# Altium PCB QTR-8A Array Sensor.PcbDoc
Units mil, origin at the board's own origin, x right, y up, seen from the top; angles counter-clockwise.
Board outline 2370 x 975 mil, 2 copper layers (Top Layer, Bottom Layer); 31 components, 15 nets, 90 pads, 17 vias.
Unrouted connection lines stored in the file: 3.
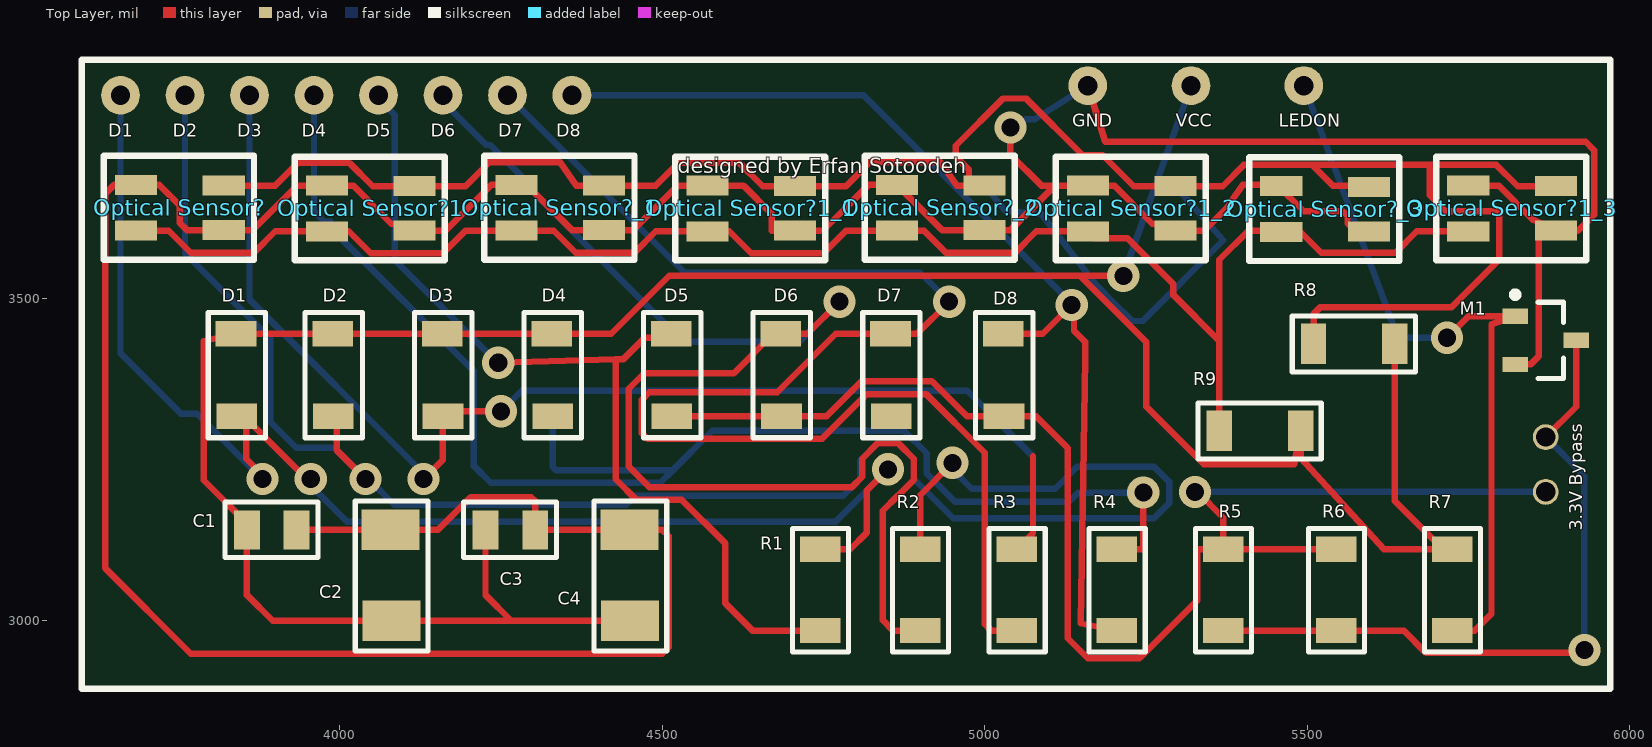
[diagram p0: Top Layer view]
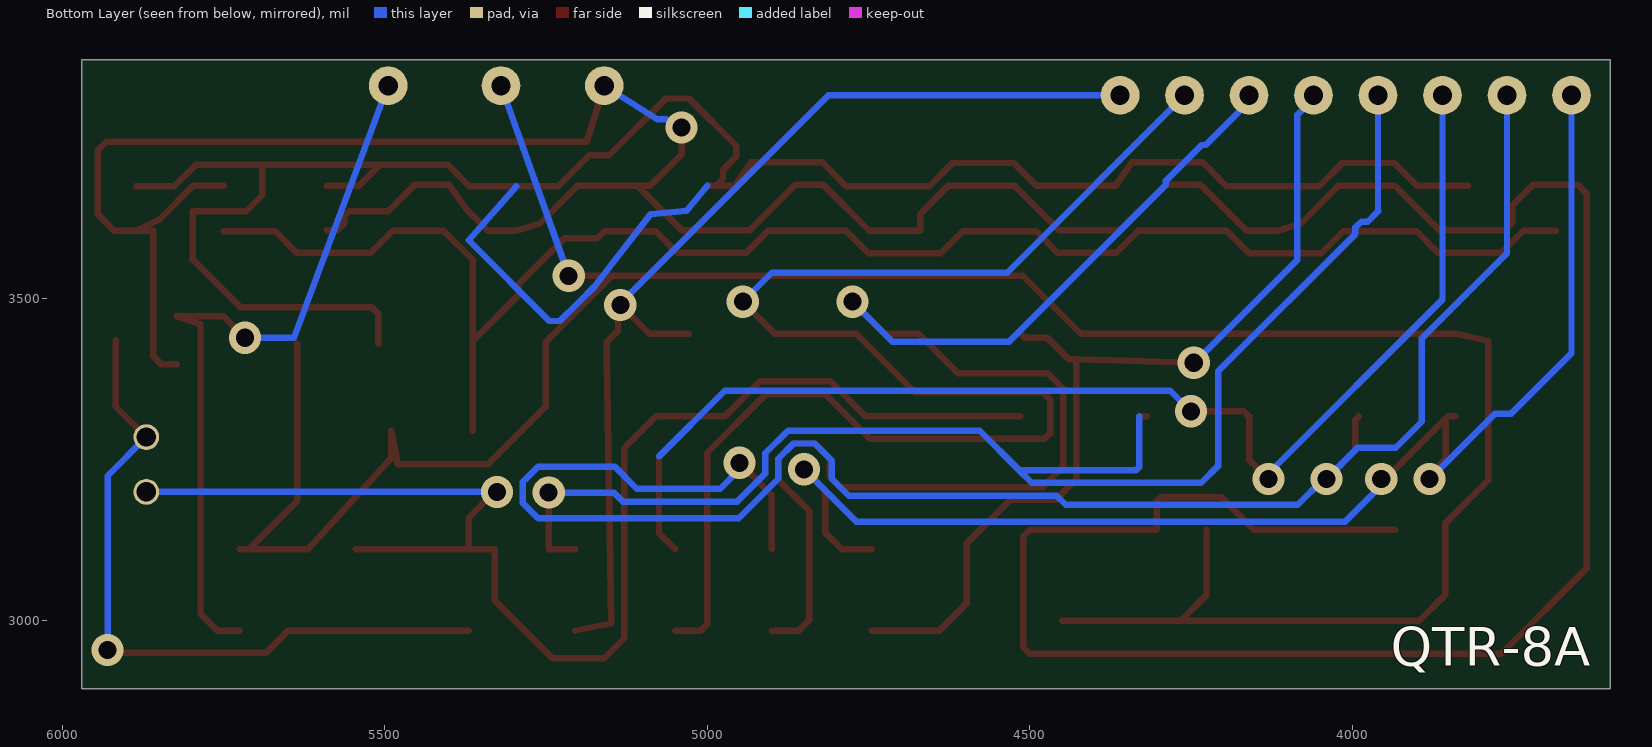
[diagram p1: Bottom Layer view, seen from below]
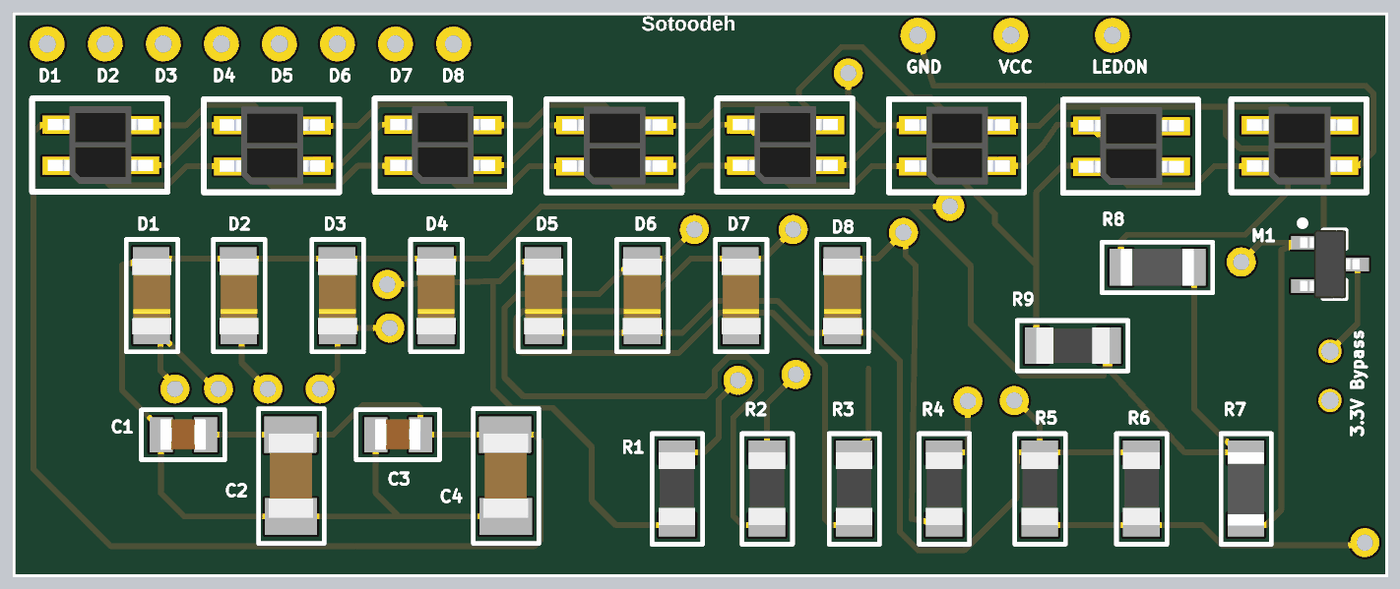
[diagram p2: 3D render of the assembled board from above, using the file's embedded part models]

## Layer stack, top to bottom
Top Solder: solder mask 0.4, Solder Resist, Dk 3.5
Top Layer: signal copper 1.4
Dielectric 1: dielectric 12.6, FR-4, Dk 4.8
Bottom Layer: signal copper 1.4
Bottom Solder: solder mask 0.4, Solder Resist, Dk 3.5

## Board outline
3600,2895 3600,3870 5970,3870 5970,2895

## Design rules (kind name [scope] priority, off if disabled: settings)
Clearance [All] p1: gap=10 ignorepadtopadclearanceinfootprint=FALSE
PolygonConnect [All] p1: connectstyle=Relief reliefconductorwidth=10 reliefentries=4 polygonreliefangle="90 Angle" airgapwidth=10
RoutingVias [All] p1: holewidth=28 width=50 viastyle="Through Hole" minholewidth=28 minwidth=50 maxholewidth=28 maxwidth=50
SMDNeckDown [All] p1: percent=50.000
SolderMaskExpansion [All] p1: expansion=4 istentingtop=FALSE
Width [All] p1: maxlimit=10 minlimit=10 preferedwidth=10
30 further rules are at their usual default settings.

## Classes and differential pairs
component class "QTR-8A Array Sensor": "3.3V Bypass" C1 C2 C3 C4 D1 D2 D3 D4 D5 D6 D7 D8 D9 M1 M? "Optical Sensor?" R1 R2 R3 R4 R5 R6 R7 R8 R9 T?

## Components (designator, comment, footprint, x,y, rotation, side; value= is the part's Value field where it differs from the comment)
"3.3V Bypass" "3.3V Bypass" "3.3V Bypass" 6030,3453 r90 top
C1 "CL21B104KBCNNNC" CL21B104KBCNNNC 3895,3075 r0 top value="0.1 µF"
C2 "C1206X105K5RAC" C1206X105K5RAC7800 4080,3070 r90 top value="1 uF"
C3 "CL21B104KBCNNNC" CL21B104KBCNNNC 4265,3075 r0 top value="0.1 µF"
C4 "C1206X105K5RAC" C1206X105K5RAC7800 4450,3070 r90 top value="1 uF"
D1 "1541201EEA400" 1541201EEA400 3840,3380 r90 top
D2 "1541201EEA400" 1541201EEA400 3990,3380 r90 top
D3 "1541201EEA400" 1541201EEA400 4160,3380 r90 top
D4 "1541201EEA400" 1541201EEA400 4330,3380 r90 top
D5 "1541201EEA400" 1541201EEA400 4515,3380 r90 top
D6 "1541201EEA400" 1541201EEA400 4685,3380 r90 top
D7 "1541201EEA400" 1541201EEA400 4855,3380 r90 top
D8 "1541201EEA400" 1541201EEA400 5030,3380 r90 top
M1 "MMFTN3402" SOT95P245X110-3N 5870,3435 r0 top
"Optical Sensor?" "qre1113gr" QRE1113GR 3669,3672 r90 top
"Optical Sensor?1" "qre1113gr" QRE1113GR 3965,3671 r90 top (schematic designator "Optical Sensor?")
"Optical Sensor?1_1" "qre1113gr" QRE1113GR 4555,3671 r90 top (schematic designator "Optical Sensor?")
"Optical Sensor?1_2" "qre1113gr" QRE1113GR 5145,3671 r90 top (schematic designator "Optical Sensor?")
"Optical Sensor?1_3" "qre1113gr" QRE1113GR 5735,3671 r90 top (schematic designator "Optical Sensor?")
"Optical Sensor?_1" "qre1113gr" QRE1113GR 4259,3672 r90 top (schematic designator "Optical Sensor?")
"Optical Sensor?_2" "qre1113gr" QRE1113GR 4849,3672 r90 top (schematic designator "Optical Sensor?")
"Optical Sensor?_3" "qre1113gr" QRE1113GR 5445,3670 r90 top (schematic designator "Optical Sensor?")
R1 "ERJ-S08F47R0V" ERJ-S08F47R0V 4890,3283 r90 top value="47 Ohms"
R2 "ERJ-S08F47R0V" ERJ-S08F47R0V 5045,3283 r90 top value="47 Ohms"
R3 "ERJ-S08F47R0V" ERJ-S08F47R0V 5195,3283 r90 top value="47 Ohms"
R4 "ERJ-S08F47R0V" ERJ-S08F47R0V 5350,3283 r90 top value="47 Ohms"
R5 "ERJ-S08F47R0V" ERJ-S08F47R0V 5515,3283 r90 top value="47 Ohms"
R6 "ERJ-S08F47R0V" ERJ-S08F47R0V 5690,3283 r90 top value="47 Ohms"
R7 "ERJ-U08F4702V" ERJ-U08F4702V 5870,3283 r90 top value="47 kOhms"
R8 "ERJ-U08F4702V" ERJ-U08F4702V 5808,3285 r0 top value="47 kOhms"
R9 "ERJ-8ENF1500V" ERJ-S08F47R0V 5662.02,3150 r0 top

## Footprints (in the part's own frame and the unit in brackets; to place one, negate y for a bottom-side part, rotate by r counter-clockwise, add the part's x,y. Pads: shape width x height; smd on the part's side, far side on the other; paste and mask are expansions set on the pad)
"3.3V Bypass" [mil]
  round 40 hole 30: 1(-253,160) 2(-168,160)
1541201EEA400 [mm]
  rect 1x1.6 smd: 1(-1.6,0) 2(1.651,0.025)
  silkscreen extent -2.44,-1.14 2.49,1.12, body extent -1.66,-0.85 1.64,0.85, height 1.19
C1206X105K5RAC7800 [mil]
  rect 62.99x90 smd: 1(-70,0) 2(71,1)
  silkscreen extent -116,-57 116,56, body extent -72,-38 73,38, height 47
CL21B104KBCNNNC [mil]
  rect 40x60 smd: 1(-39,66) 2(38,66)
  silkscreen extent -73,23 71,109, body extent -40,40 38,93, height 50
ERJ-S08F47R0V [mm]
  rect 1x1.6 smd: 1(-7.569,3.683) 2(-4.369,3.683)
  silkscreen extent -8.41,2.57 -3.56,4.78, body extent -7.57,2.88 -4.37,4.48, height 0.71
ERJ-U08F4702V [mm]
  rect 1x1.6 smd: 1(-7.569,3.683) 2(-4.369,3.683)
  silkscreen extent -8.41,2.57 -3.56,4.78, body extent -7.58,2.88 -4.38,4.48, height 0.6
QRE1113GR [mil]
  rect 31.1x65.35 / inner rect 31.1x65.35 / far side rect 0x0 all layers, no hole paste-99999: 1(-67,-15) 2(-66,-151) 3(3,-151) 4(4,-15)
  silkscreen extent -112,-198 49,35, body extent -98,-173 36,8, height 74
SOT95P245X110-3N [mm] "SOT23, 3-Leads, Body 2.95x2.45mm, Pitch 0.95mm, IPC Medium Density"
  rect 1x0.6 smd: 1(-1.2,0.95) 2(-1.2,-0.95) 3(1.2,0)
  silkscreen extent -1.32,-1.5 0.7,1.92, body extent -1.3,-1.5 1.3,1.5, height 1.1

## Part data
C1 C3: "0.1 µF ±10% 50V Ceramic Capacitor X7R 0805 (2012 Metric)", Capacitance="0.1 µF", Package / Case=0805, Voltage - Rated=50V, Mounting Type="Surface Mount, MLCC"
C2 C4: "Multilayer Ceramic Capacitors MLCC - SMD/SMT 50V 1uF X7R 1206 10%", Capacitance="1 uF", Package / Case=1206, Voltage - Rated="50 VDC", Mounting Type="Surface Mount Multilayer Ceramic Chip Capacitor"
D1 D2 D3 D4 D5 D6 D7 D8: "Photodiodes WL-SDCB SMT Photodiode Chip Blk", Package/Case=1206, Voltage="32 V", Mounting Style=SMD/SMT, Product=Photodiodes
M1: "MOSFETs MOSFET, SOT-23, 30V, 4A, 150C, N", Package/Case=SOT-23, Id="4 A", Mounting Style=SMD/SMT, Number of Channels="1 Channel", Product Category=MOSFETs, Subcategory=Transistors, Transistor Polarity=N-Channel, Vds="30 V", Vgs="- 12 V, + 12 V"
"Optical Sensor?" "Optical Sensor?1" "Optical Sensor?1_1" "Optical Sensor?1_2" "Optical Sensor?1_3" "Optical Sensor?_1" "Optical Sensor?_2" "Optical Sensor?_3": "SENSOR OPTO TRANS REFL SMD PHOTO", Current - Collector (Ic) (Max)="20 mA", Current - DC Forward (If) (Max)="50 mA", Manufacturer=onsemi, Package/Case="4-SMD, Gull Wing", Voltage - Collector Emitter Breakdown (Max="30 V", Category="Sensors, Transducers,Optical Sensors", Mounting Style=SMD/SMT, Output Type=Phototransistor
R1 R2 R3 R4 R5 R6: "Thick Film Resistors - SMD 1206 47ohms 1% Anti-Sulfur", Case=1206, Manufacturer=Panasonic, Resistance="47 Ohms", Tolerance="1 %", Mounting Style="PCB Mount"
R7 R8: "Thick Film Resistors - SMD 1206 1% 47Kohm Anti-Sulfur AEC-Q200", Case=1206, Manufacturer=Panasonic, Resistance="47 kOhms", Tolerance="1 %", Mounting Style="PCB Mount"
R9: "Thick Film Resistors - SMD 1206 150ohms 1% AEC-Q200", Case=1206, Manufacturer=Panasonic, Resistance="150 ohm", Tolerance="1 %", Mounting Style="PCB Mount"

## Free pads (board coordinates)
  round 60 hole 30: D1(3660,3815) D2(3760,3815) D3(3860,3815) D4(3960,3815) D5(4060,3815) D6(4160,3815) D7(4260,3815) D8(4360,3815) GND(5160,3830) LEDON(5495,3830) VCC(5320,3830)

## Via types
v1: diameter 50, hole 28, Top Layer to Bottom Layer, 17 vias

## Nets (pads, with @x,y where several pads share a name; then routed paths per layer and width w, separated by ;. In a path a pad name is that pad's centre, name@x,y a point inside that pad or via, vN(x,y) a via of type N, cw(c..) or ccw(c..) an arc to the next point about the centre after c; other vN are vias at no path point)
GND: "Optical Sensor?1.2" "Optical Sensor?1.4" "Optical Sensor?1_1.2" "Optical Sensor?1_1.4" "Optical Sensor?1_2.2" "Optical Sensor?1_2.4" "Optical Sensor?1_3.2" "Optical Sensor?1_3.4" "Optical Sensor?.2" "Optical Sensor?.4" "Optical Sensor?_1.2" "Optical Sensor?_1.4" "Optical Sensor?_2.2" "Optical Sensor?_2.4" "Optical Sensor?_3.2" "Optical Sensor?_3.4" C1.2 C2.2 C3.2 C4.2 M1.2 pad.GND | length 6427.9
  Top Layer w10: C1.2 C2.2 4152,3141 4202.86,3191.86 4297.14,3191.86 4303,3186 C3.2 C4.2 4500,3141 4510,3131 4510,2959 4500,2949 3769,2949 3636,3082 3636,3662 3650,3676 3684,3676 3720,3676 3752,3644 3752,3617 3763,3606 3820,3606 3865,3606 3934,3675 3980,3675 4021,3675 4080,3616 4116,3605 4164,3605 4235,3676 4274,3676 4290,3676 4360,3606 4410,3606 4455,3606 4524,3675 4570,3675 4626,3675 4670,3631 4670,3605 4706,3605 4749,3605 4820,3676 4864,3676 4934,3606 5000,3606 5040,3606 5109,3675 ; v1(5040,3765) 5040,3723 5088,3675 5109,3675 ; pad.GND 5187,3743 5932,3743 5945,3730 5945,3630 5920,3605 5886,3605 ; 5590,3606 5573.25,3606 5562.7,3616.55 5562.7,3628.14 5556.84,3634 5556,3634 5555,3635 5495,3635 5454,3676 5400,3676 5375,3640 5340,3605 5296,3605 5260,3616 5201,3675 5160,3675 5109,3675 ; 5750,3675 5797.23,3675 5850,3622.23 5886,3605 ; M1.2 5846.6,3397.6 5859,3410 5859,3605 5886,3605
  Bottom Layer w10: v1(5040,3765) 5050.82,3765 5063.48,3777.65 5077.65,3777.65 pad.GND
LEDON: M1.1 pad.LEDON R7.1 | length 1172.5
  Top Layer w10: v1(5717,3439) 5750.4,3472.4 M1.1 5786,3460 5786,3011 5760,2985 R7.1
  Bottom Layer w10: pad.LEDON 5641,3439 v1(5717,3439)
"Net3.3V Bypass_1": "3.3V Bypass.1" D5.1 D6.1 D8.1 R5.2 R6.2 | length 2173.3
  Top Layer w10: D5.1 D6.1 4754.32,3317 4809.01,3371.69 4918.31,3371.69 4973,3317 D8.1 5080,3317 5129,3268 5129,2973 5160,2942 5240,2942 5330,3032 5330,3110.98 R5.2 ; v1(5326,3200) 5330,3200 5370,3160 R5.2 ; R6.2 R5.2
  Bottom Layer w10: v1(5326,3200) 5870,3200
"Net3.3V Bypass_2": "3.3V Bypass.2" M1.3 R5.1 R6.1 | length 1100.7
  Top Layer w10: R5.1 R6.1 5649.76,2985 5684.45,2950.31 5925.31,2950.31 v1(5930,2955) ; 5870,3285 5917.24,3332.24 M1.3
  Bottom Layer w10: 5870,3285 5930,3225 v1(5930,2955)
NetD1_1: D1.1 pad.D1 R1.2 | length 2109.8
  Top Layer w10: D1.1 3851.81,3317 3948.81,3220 v1(3955,3220) ; D1.1@3855.03,3306.97 3855.03,3251.6 3880,3226.63 v1(3880,3220) ; R1.2 4791.5,3110.98 4816.92,3136.41 4816.92,3201.92 v1(4850,3235)
  Bottom Layer w10: pad.D1 3660,3415 3753.67,3321.33 3778.67,3321.33 v1(3880,3220) ; v1(3955,3220) 3955,3210 4011,3154 4769,3154 v1(4850,3235)
NetD2_1: D2.1 pad.D2 R2.2 | length 2826.3
  Top Layer w10: D2.1 3995,3312 3995,3265 v1(4040,3220) ; R2.2 4900,3195 v1(4950,3245)
  Bottom Layer w10: 3760,3570 3892,3438 3892,3308.86 3932.6,3268.26 3991.74,3268.26 v1(4040,3220) 4044.57,3220 4084.57,3180 4444.46,3180 4458.46,3194 4780.72,3194 4807.07,3220.36 4807.07,3248.64 4833.43,3275 4866.57,3275 4890,3251.57 4890,3220.15 4951.15,3159 5262.57,3159 5286,3182.43 5286,3215.57 5262.57,3239 5143.27,3239 5109.27,3205 4980,3205 4950,3235 v1(4950,3245) ; 3760,3571.72 pad.D2
NetD3_1: D3.1 pad.D3 R3.2 | length 1944.5
  Top Layer w10: v1(4130,3220) 4160,3250 D3.1 4168,3325 v1(4250,3325) ; R3.2 5075,3135.98 5075,3255
  Bottom Layer w10: pad.D3 3860,3498.28 4130,3228.28 v1(4130,3220) ; v1(4250,3325) 4282,3357 4973,3357 5075,3255
NetD4_1: D4.1 pad.D4 R4.2 | length 2240
  Top Layer w10: D4.1@4318.22,3317 D4.1 ; R4.2 5246,3110.98 v1(5246,3199)
  Bottom Layer w10: 3959.93,3635.07 3976,3619 3986.21,3619 3995,3610.21 3995,3600 4208,3387 4208,3240 4234,3214 4496.75,3214 4515.97,3233.22 ; 3960,3638 pad.D4 ; 4330,3317 4330,3239.07 4335.86,3233.22 4515.97,3233.22 ; v1(5246,3199) 5144.98,3199 5130.98,3185 4953.43,3185 4910,3228.43 4910,3259.85 4874.85,3295 4577.75,3295 4515.97,3233.22
NetD5_2: D5.2 pad.D5 R1.1 | length 1431.9
  Top Layer w10: v1(4245.74,3400.26) 4428,3406 ; D5.2 4508.36,3439.36 4473.36,3439.36 4440,3406 4428,3406 ; R1.1 4640,2985 4598,3027 4598,3120 4530.5,3187.5 4460,3187.5 4428,3219.5 4428,3406
  Bottom Layer w10: pad.D5 4060,3809.64 4085,3784.64 4085,3560 4244.74,3400.26 v1(4245.74,3400.26)
NetD6_2: D6.2 pad.D6 R2.1 | length 2154
  Top Layer w10: v1(4775,3495) 4725,3445 4672.19,3445 4611.19,3384 4472,3384 4448,3360 4448,3239.5 4480,3207.5 4794.21,3207.5 4810,3223.28 4810,3251.57 4833.43,3275 4866.57,3275 4890,3251.57 4890,3218.43 4866.07,3194.5 4865.72,3194.5 4841.79,3170.57 4841.79,3001.21 4858,2985 R2.1
  Bottom Layer w10: pad.D6 4160,3805 4227.06,3737.94 4233.27,3737.94 4289,3682.21 4289,3676 4530,3435 ; 4532,3433 4713,3433 v1(4775,3495)
NetD7_2: D7.2 pad.D7 R3.1 | length 2330.3
  Top Layer w10: v1(4945,3495) 4895,3445 4769,3445 4678.36,3354.36 4479.97,3354.36 4468.5,3342.9 4468.5,3291.1 4477.29,3282.31 4747.92,3282.31 4817.29,3351.69 4909.04,3351.69 5000,3260.73 5000,2995 5010,2985 R3.1
  Bottom Layer w10: pad.D7 4535,3540 4900,3540 v1(4945,3495)
NetD8_2: D8.2 pad.D8 R4.1 | length 1593.4
  Top Layer w10: D8.2 5090,3445 v1(5135,3490) 5138.59,3486.41 5138.59,3450 5156,3432.59 5156,3407 5149,2996 R4.1
  Bottom Layer w10: pad.D8 4758,3815 ; 4759.98,3815.03 4812.19,3815.03 5135,3492.21 v1(5135,3490)
"NetOptical Sensor?_1": "Optical Sensor?1.1" "Optical Sensor?1_1.1" "Optical Sensor?1_2.1" "Optical Sensor?1_3.1" "Optical Sensor?.1" "Optical Sensor?_1.1" "Optical Sensor?_2.1" "Optical Sensor?_3.1" R9.1 | length 2598.2
  Top Layer w10: 3684,3605 3735,3605 3769,3571 3867,3571 3900,3604 3980,3604 4014,3604 4048,3570 4160,3570 4195,3605 4274,3605 4332,3605 4366,3571 4457,3571 4490,3604 4570,3604 4604,3604 4638,3570 4750,3570 4785,3605 4864,3605 4906,3605 4940,3571 5047,3571 5080,3604 5160,3604 5170.54,3593.46 5221.52,3593.46 5292.77,3522.21 5292.77,3505.23 5364.02,3433.98 ; R9.1 5364.02,3433.98 ; 5750,3604 5670,3604 5637,3571 5522,3571 5488,3605 5454,3605 5409.02,3605 5364.02,3560 5364.02,3433.98
OUT: "Optical Sensor?1.3" "Optical Sensor?1_1.3" "Optical Sensor?1_2.3" "Optical Sensor?1_3.3" "Optical Sensor?.3" "Optical Sensor?_1.3" "Optical Sensor?_2.3" "Optical Sensor?_3.3" R8.1 | length 3772.1
  Top Layer w10: 3820,3675 3900,3675 3935,3710 4015,3710 4051,3674 4116,3674 4195,3674 4232,3711 4342,3711 4367,3675 4410,3675 4490,3675 4525,3710 4620,3710 4656,3674 4706,3674 4785,3674 4822,3711 4932,3711 4957,3675 4989.05,3675 5000,3675 4986.28,3675 4975.73,3685.55 4975.73,3699.27 4955,3720 4955,3736.57 5028.43,3810 5064.19,3810 5152.31,3721.88 5183.12,3721.88 5231,3674 5296,3674 5369,3674 5402,3707 5510,3707 5690,3707 5694,3707 ; R8.1 5510,3476 5520,3486 5723.68,3486 5797.68,3560 5797.68,3635 5715,3635 5690,3660 5690,3703 5694,3707 ; 5510,3705 5540,3675 5590,3675 ; 5886,3674 5826.52,3674 5793.52,3707 5694,3707
  Bottom Layer w10: 5000,3675 5029.08,3639.52 5029.4,3639.14 5032.27,3636.26 5087.43,3630.8 5090.41,3627.82 5090.8,3627.31 5175,3518.43 5198.43,3495 5228.91,3465 5230.48,3465 5245,3465 5370,3590 5296,3674
VCC: C1.1 C2.1 C3.1 C4.1 D1.2 D2.2 D3.2 D4.2 pad.VCC R7.2 R8.2 R9.2 | length 4219
  Top Layer w10: C3.1 4226,3040 4266,3000 ; C4.1 4266,3000 ; 5150.17,3533 5250.74,3432.42 5250.74,3332.26 5340,3243 5480,3243 R9.2 5490,3253 5619.02,3110.98 R7.2@5710.91,3110.98 ; v1(5215,3535) 4511,3535 4421,3445 D4.2 D3.2 D2.2 D1.2 3789,3434 3789,3218 3856,3151 3856,3040 3896,3000 C2.1 4266,3000 ; R8.2 5635.98,3185.91 R7.2@5710.91,3110.98 ; R7.2 R7.2@5710.91,3110.98
  Bottom Layer w10: v1(5215,3535) pad.VCC
pads on no net: D7.1

## Silkscreen, mask and mechanical layers (free items; w line width, h text height)
Top Overlay:
  the board outline again, w10
  text "GND" at 5136,3766 h20
  text "VCC" at 5296,3766 h20
  text "LEDON" at 5456,3766 h20
  text "D1" at 3641,3751 h20
  text "D2" at 3741,3751 h20
  text "D3" at 3841,3751 h20
  text "D4" at 3941,3751 h20
  text "D5" at 4041,3751 h20
  text "D6" at 4141,3751 h20
  text "D7" at 4246,3751 h20
  text "D8" at 4336,3751 h20
  text "designed by Erfan Sotoodeh" at 4524.31,3686.36 h40
Bottom Overlay:
  text "QTR-8A" at 3940,2930.71 h60